# Altium PCB PCB ASCII (3u v0.1-A1).PcbDoc (part 2 of 2)
Units mil, origin at the board's own origin, x right, y up, seen from the top; angles counter-clockwise.
Board outline 2630 x 740 mil, 4 copper layers (Top Layer, Mid-Layer 1, Mid-Layer 2, Bottom Layer), stack 61.6 mil thick; 74 components, 43 nets, 261 pads, 288 vias.
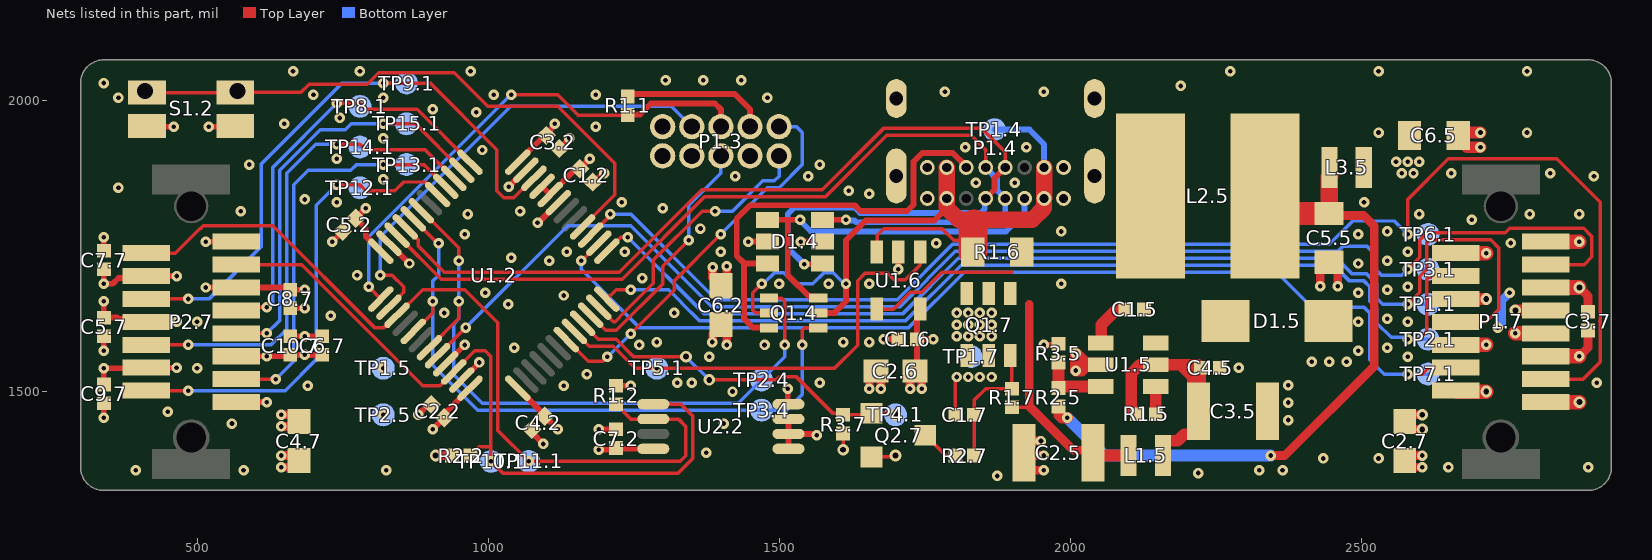
[diagram p2: the nets of this part, all layers, seen from the top]

## Part data
C1.2 C1.5 C1.6 C1.7 C2.2 C2.5 C3.2 C3.5 C3.7 C4.2 C4.5 C5.2 C5.5 C5.7 C6.5 C6.7 C7.2 C7.7 C8.7 C9.7 C10.7: library part "CAPACITOR NON_POL"
C2.6: library part C0402, "derates to 2.2"
C2.7 C4.7 C6.2: library part C0402
D1.5: "Schottky Diode"
L1.5 L2.5 L3.5: library part Inductor, "Inductor"
P1.3: "Header, 10-Pin"
P1.4: "USB C Connector"
P1.7 P2.7: "Header, 15-Pin"
Q2.7: "N-Channel Enhancement Mode Vertical DMOS FET"
R1.1 R1.2 R1.6 R1.7 R2.2 R2.7 R3.7: library part RESISTOR
R1.5: library part ERJ2GE
R2.5 R3.5: library part ERJ2GE, "Resistor"
S1.2: "Momentary switch"
TP1.1 TP1.4 TP1.5 TP1.7 TP2.1 TP2.4 TP2.5 TP3.1 TP3.4 TP4.1 TP5.1 TP6.1 TP7.1 TP8.1 TP9.1 TP10.1 TP11.1 TP12.1 TP13.1 TP14.1 TP15.1: library part Socket, "Socket"
U1.5: library part ADP2300, "IC BUCK ADJ 1.2A 6TSOT"
U1.6: library part INA180, "Current Sense Amp"

## Via types
v1: diameter 18, hole 8, Top Layer to Bottom Layer, tented both sides, 275 vias
v2: diameter 20, hole 10, Top Layer to Bottom Layer, tented both sides, 13 vias

## Nets (pads, with @x,y where several pads share a name; then routed paths per layer and width w, separated by ;. In a path a pad name is that pad's centre, name@x,y a point inside that pad or via, vN(x,y) a via of type N, cw(c..) or ccw(c..) an arc to the next point about the centre after c; other vN are vias at no path point)
3V3: C1.2.1 C1.6.1 C2.2.1 C2.6.2 C3.2.1 C4.2.1 C4.7.2 C5.2.1 C5.7.1 C6.2.2 C6.5.2 C6.7.1 C7.2.1 C7.7.2 C8.7.2 C9.7.2 C10.7.2 L3.5.2 P1.3.1 P2.7.4 P2.7.5 P2.7.11 P2.7.12 R1.2.2 R2.2.2 TP1.5.1 U1.2.1 U1.2.20 U1.2.21 U1.2.24 U1.2.36 U1.2.48 U1.6.5 U2.2.1 U2.2.2 U2.2.3 U2.2.8 | length 1823.1
  Top Layer w10: v1(339.79,1570) 339.89,1570.11 339.89,1594.89 C5.7.1@340,1595 ; v1(339.79,1685) 339.86,1685.07 355.07,1685.07 365,1695 409.41,1695 P2.7.4@412.83,1698.43 v1(465,1698.43) ; v1@339.89,1685.11 339.89,1709.89 C7.7.2@340,1710 ; C9.7.2@340,1511.97 339.79,1512.18 v1(339.79,1540) 411.89,1540 P2.7.12@412.83,1540.94 v1(464.79,1540.94) ; v1(514.79,1678.74) P2.7.5@567.17,1678.74 656.26,1678.74 C8.7.2@660,1675 v1(685,1675) ; P2.7.11@567.17,1560.63 v1(619.79,1560.63) 657.6,1560.63 C10.7.2@660,1563.03 v1(685,1563.03) C6.7.1@715,1563.03 ; C5.2.1@772.61,1797.61 v1(790,1815) ; C5.2.1@775,1795 790,1780 790,1766.89 U1.2.36@815.82,1741.06 ; v1(905,1435) C2.2.1@925,1455 925,1461.89 U1.2.48@968.94,1505.82 ; U1.2.1@1051.06,1505.82 1097.61,1459.28 C4.2.1@1097.61,1457.61 1120,1435.21 v1(1120,1435) ; U1.2.24@1051.06,1894.18 1096.89,1940 C3.2.1@1100,1940 1100,1942.61 1114.79,1957.39 v1(1114.79,1960) ; U1.2.21@1092.82,1852.42 U1.2.20@1106.74,1838.5 1150.85,1882.61 C1.2.1@1157.39,1882.61 v1(1174.79,1900) ; v1(1190,1400) 1216.97,1400 C7.2.1@1220,1403.03 1221.42,1401.61 U2.2.8@1283.86,1401.61 ; R1.2.2@1220,1510 v1(1245,1510) ; U2.2.1@1516.14,1401.61 U2.2.3@1516.14,1452.8 ; U2.2.2@1516.14,1427.2 1560.09,1427.2 1562.29,1425 v1(1565,1425) ; C2.6.2@1733.46,1535 1736.97,1538.5 C1.6.1@1736.97,1590 ; U1.6.5@1742.4,1641.57 1736.97,1636.14 C1.6.1@1736.97,1590 ; v1(1765,1590) C1.6.1@1736.97,1590
  Top Layer w15: v1(645,1370) 663.46,1370 C4.7.2@675,1381.54 666.54,1390 v1(645,1390) ; v2(910,1390) R2.2.2@938.03,1390 ; v1(1385,1585) 1385.96,1585 1385.96,1598.99 1400,1613.03 C6.2.2@1400,1615 1410,1605 v1(1410,1580) ; v1(1725,1505) 1725,1526.54 C2.6.2@1733.46,1535 1745,1523.46 v1(1745,1505)
  Bottom Layer w15: v1(2735,1610) 2735,1610.81 2741.5,1617.31 2741.5,1656.5 v1(2755,1670)
  other v1: 1875,1355 2220,1360 395,1365 580,1365 825,1365 2650,1370 2890,1370 2435,1385 2530,1385 1375,1395 560,1445 1405,1445 450,1465 1420,1500 690,1510 1130,1510 1325,1515 1570,1515 2905,1515 820,1540 1045,1575 1290,1585 1610,1585 1655,1585 730,1630 1320,1635 1035,1650 1130,1665 995,1670 1655,1685 1985,1685 1105,1725 1040,1730 1400,1740 1770,1755 2756.98,1755.18 1985,1775 2690,1795 965,1805 2600,1805 2790,1805 2875,1805 575,1810 1055,1810 1300,1815 685,1830 1655,1840 365,1850 1425,1870 2900,1870 2570,1875 2590,1875 2655,1875 2825,1875 590,1890 1570,1890 2560,1895 2580,1895 2600,1895 990,1915 1185,1955 650,1960 980,1980 905,1985 365,2005 1480,2005 700,2010 1185,2010 1785,2015 1955,2015 2190,2025 780,2050 970,2050
ENTER_BL: S1.2.1 S1.2.1_1 S1.2.1_2 S1.2.1_3 U1.2.16 | length 1014.7
  Top Layer w6: S1.2.1@414.21,2013.54 S1.2.1_1@565.79,2013.54 566.39,2014.15 678.69,2014.15 692.54,2028 792.54,2028 812.54,2048 942,2048 999.83,1990.17 1119.83,1990.17 1217.79,1892.21 1217.79,1838.25 1162.42,1782.87 U1.2.16@1162.42,1782.82
GND: C1.2.2 C1.6.2 C2.2.2 C2.5.1 C2.6.1 C2.7.1 C3.2.2 C3.5.1 C3.7.2 C4.2.2 C4.5.1 C4.7.1 C5.2.2 C5.5.1 C5.7.2 C6.2.1 C6.5.1 C6.7.2 C7.2.2 C7.7.1 C8.7.1 C9.7.1 C10.7.1 D1.4.2 D1.4.5 D1.5.A P1.3.3 P1.4.1 P1.4.1_1 P1.4.1_2 P1.4.1_3 P1.4.A1 P1.4.A12 P1.4.B1 P1.4.B12 P1.7.1 P1.7.2 P1.7.9 P1.7.10 P1.7.11 P2.7.1 P2.7.8 P2.7.15 Q2.7.2 R3.5.1 R3.7.1 S1.2.2 S1.2.2_1 TP2.5.1 U1.2.19 U1.2.23 U1.2.35 U1.2.45 U1.2.47 U1.5.2 U1.6.2 U2.2.4 | length 2194.3
  Top Layer w6: v2(1610,1400) R3.7.1@1610,1428.03 ; Q2.7.2@1658.74,1387.6 1697.6,1387.6 v2(1700,1390)
  Top Layer w10: v1(339.79,1455) 339.89,1455.11 339.89,1479.89 C9.7.1@340,1480 ; v1(339.79,1655) 339.79,1627.18 C5.7.2@340,1626.97 363.03,1626.97 365,1625 407.52,1625 P2.7.8@412.83,1619.68 v1(465,1619.68) ; v1(339.79,1765) 339.89,1764.89 339.89,1742.07 C7.7.1@340,1741.97 ; S1.2.2@413.27,1955.52 S1.2.2@414.21,1956.46 415.67,1955 v1(460,1955) ; v1(515,1757.48) P2.7.1@567.17,1757.48 ; v1(520,1955) 567.24,1955 S1.2.2_1@565.79,1956.46 ; P2.7.15@567.17,1481.89 v1(619.79,1481.89) ; C10.7.1@660,1595 v1(685,1595) C6.7.2@715,1595 ; C8.7.1@660,1643.03 v1(685,1643.03) ; v1(732.61,1757.61) C5.2.2@750,1775 ; U1.2.35@829.74,1754.98 864.73,1720 v1(865,1720) ; v1(880,1460) 897.61,1477.61 C2.2.2@902.39,1477.61 ; U1.2.45@927.18,1547.58 959.6,1580 v1(960,1580) ; U1.2.47@955.02,1519.74 985.27,1550 v1(985,1550) ; v1@1036.64,1851.91 v1(1035.4,1851.91) U1.2.23@1052.38,1868.88 ; U1.2.23@1052.4,1868.86 1053.58,1868.86 U1.2.23@1064.98,1880.26 ; C4.2.2@1075,1435 1075,1430 v1(1095,1410) ; v1(1085,1790) 1086.08,1790 U1.2.19@1120.66,1824.58 ; C3.2.2@1122.61,1917.39 1122.61,1917.61 1139.79,1934.79 v1(1139.79,1935) ; C1.2.2@1180,1860 1182.39,1860 1197.39,1875 v1(1199.79,1875) ; v1(1190,1435) C7.2.2@1220,1435 ; v1(1447.24,1757.6) D1.4.2@1480,1757.6 ; v1(1515,1505) 1515,1479.53 U2.2.4@1516.14,1478.39 ; v1(1537.24,1757.6) D1.4.5@1574.49,1757.6 ; v1(1680,1590) C1.6.2@1705,1590 ; v1(1705,1710) U1.6.2@1705,1740 ; v1(1955,1580) 1978.03,1580 R3.5.1@1980,1581.97
  Top Layer w15: v1(645,1440) 666.54,1440 C4.7.1@675,1448.46 663.46,1460 v1(645,1460) ; v1(1385.83,1713.4) 1385.83,1696.1 C6.2.1@1400,1681.93 1410,1691.93 v1(1410,1715) ; v1(1655,1505) 1655,1523.46 C2.6.1@1666.54,1535 1675,1526.54 v1(1675,1505) ; v1(1950,1415) 1930.94,1415 1920.94,1405 C2.5.1@1920.94,1402.19 ; v1(1955,1365) 1933.13,1365 1920.94,1377.19 C2.5.1@1920.94,1402.19 ; v1(1955,1390) 1933.13,1390 C2.5.1@1920.94,1402.19 ; v1(2430,1681.06) 2430,1709.56 2442.5,1722.06 C5.5.1@2445,1722.06 2447.5,1722.06 2460,1709.56 v1(2460,1681.06) ; v1(2605,1370) 2586.54,1370 C2.7.1@2575,1381.54 2583.46,1390 v1(2605,1390) ; v1(2875,1560.63) 2890,1575.63 C3.7.2@2890,1605
  Top Layer w20: v1(2705,1920) 2682,1920 2667,1935 C6.5.1@2667,1940 2677,1950 2682,1945 v1(2705,1945) ; v1(2010,1536.06) v1(2010,1566.06) 2027.21,1548.86 2049.96,1548.86 U1.5.2@2052.76,1546.06 2049.96,1543.27 2027.2,1543.27 2020,1536.06 v1(2010,1536.06)
  Top Layer w25: P1.7.10@2662.83,1580.31 v1(2715,1580.31) ; P1.7.2@2662.83,1737.8 v1(2715,1737.8) ; v1(2765,1600) P1.7.9@2817.17,1600 ; P1.7.11@2817.17,1560.63 v1(2875,1560.63) ; P1.7.1@2817.17,1757.48 v1(2875,1757.48)
  other v1: 2325,1365 2365,1365 2375,1451.06 820,1460 2375,1481.06 2375,1511.06 1350,1515 1170,1530 500,1540 2290,1541.06 2415,1551.06 2445,1551.06 2475,1551.06 1380,1560 2580,1560 2495,1570 2545,1575 1260,1580 1475,1580 500,1620 2495,1620 2580,1620 2545,1625 925,1635 2495,1670 2545,1675 2580,1680 1500,1685 1585,1685 1265,1695 775,1700 2495,1720 2545,1725 1135,1740 1235,1740 2580,1740 960,1770 2495,1770 2545,1775 1365,1780 740,1825 1230,1825 2505,1825 1620,1845 1838.27,1858.42 1905.2,1858.42 820,1865 1550,1870 740,1900 1820,1920 1925,1920 820,1935 2530,1945 2785,1945 745,1970 820,2005 1010,2010 340,2030 1305,2035 1370,2035 1435,2035 665,2050 2275,2050 2530,2050 2785,2050
I2C1_SCL: P2.7.2 R1.2.1 TP11.1.1 U1.2.39 U2.2.6 | length 1466.6
  Top Layer w6: P2.7.2@412.83,1737.8 462.82,1737.8 505,1779.98 505.96,1779.98 510.98,1785 630,1785 805,1610 821.24,1610 842.33,1631.1 U1.2.39@843.66,1631.1 887.56,1675 960,1675 1017,1618 1017,1433 v1(1070,1380) 1330,1380 1340,1390 1340,1440 1327.2,1452.8 U2.2.6@1283.86,1452.8 1245.24,1452.8 R1.2.1@1220,1478.03
I2C1_SDA: P2.7.3 R2.2.1 TP10.1.1 U1.2.46 U2.2.5 | length 1291.1
  Top Layer w6: P2.7.3@567.17,1718.11 679.92,1718.11 888.03,1510 917.44,1510 U1.2.46@941.1,1533.66 977.44,1570 995,1570 1005,1560 1005,1405 ; R2.2.1@970,1390 985,1405 1005,1405 ; U2.2.5@1285,1479.53 U2.2.5@1283.86,1478.39 1331.61,1478.39 1352,1458 1352,1385.03 1326.97,1360 1025,1360 v1(1005,1380) 1005,1405
NetC1.5_1: C1.5.1 U1.5.1 | length 83.9
  Top Layer w20: U1.5.1@2052.76,1583.46 2053.48,1584.19 2053.48,1614.54 2080,1641.06 C1.5.1@2095,1641.06
NetC1.5_2: C1.5.2 D1.5.K L2.5.1 U1.5.6
NetC1.7_2: C1.7.2 Q1.7.3 R1.7.1 R2.7.2 | length 226.2
  Top Layer w6: R2.7.2@1835,1390 C1.7.2@1835,1460 1835,1485 1855,1505 R1.7.1@1900,1505 1900,1559.25 Q1.7.3@1897.4,1561.85
NetC3.5_2: C3.5.2 C4.5.2 L1.5.2 R1.5.2 U1.5.5 | length 490.6
  Top Layer w20: R1.5.2@2115,1461.06 2105,1471.06 2105,1531.06 2120,1546.06 U1.5.5@2147.24,1546.06 2190,1546.06 ; L1.5.2@2159.53,1390 2159.53,1411.65 2163.31,1415.43 2184.96,1415.43 2196.38,1426.85 2211.26,1426.85 C3.5.2@2220.94,1436.54 ; C3.5.2@2220.94,1466.06 C3.5.2@2213.76,1473.25 ; 2190,1546.06 2211.26,1524.8 2211.26,1475.75 C3.5.2@2213.76,1473.25 ; 2190,1546.06 2220,1546.06 C4.5.2@2225,1541.06 2223.19,1539.25 2223.19,1482.68 C3.5.2@2213.76,1473.25
  Top Layer w30: C3.5.2@2220.94,1436.54 C3.5.2@2220.94,1466.06
NetC5.5_2: C5.5.2 L2.5.2 L3.5.1 R2.5.2 | length 1163.2
  Top Layer w15: v1(2345,1390) 2368.94,1390 2522.5,1543.56 2522.5,1784.32 2504.32,1802.5 2448.56,1802.5 C5.5.2@2445,1806.06
  Top Layer w20: R2.5.2@1980,1474.09 1981.81,1472.28 1981.81,1459.25 1986.06,1455 v1(1995,1455)
  Top Layer w30: C5.5.2@2445,1806.06 2445,1869.25 L3.5.1@2446.22,1870.47
  Top Layer w40: L2.5.2@2335,1836.06 2365,1806.06 C5.5.2@2445,1806.06
  Bottom Layer w20: v1(1995,1455) 2060,1390 v1(2345,1390)
NetD1.4_1: D1.4.1 P1.4.A5 Q1.4.3 | length 667.1
  Top Layer w10: D1.4.1@1478.8,1793.8 D1.4.1@1480,1795 1515,1795 ; v1(1536,1795) 1515,1795 ; Q1.4.3@1556.54,1663.46 1564.45,1663.46 Q1.4.3@1567.32,1660.59 ; Q1.4.3@1567.91,1660 Q1.4.3@1567.32,1660.59 ; 1515,1795 1515,1700 1554.41,1660.59 Q1.4.3@1567.32,1660.59
  Bottom Layer w10: v1(1536,1795) 1536,1794 1555,1775 1890,1775 1921.93,1806.93 P1.4.A5@1921.93,1831.85
NetD1.4_3: D1.4.3 P1.4.B5 Q1.4.6 | length 770.8
  Top Layer w10: D1.4.3@1480,1720.2 1440,1720.2 ; Q1.4.6@1482.68,1609.41 1482.09,1610 1455,1610 1440,1625 1440,1720.2 ; P1.4.B5@1821.54,1885 1821.54,1886.89 1798.43,1910 1745.95,1910 1730.81,1894.86 1730.81,1820.81 1720,1810 1640,1810 1630,1820 1450,1820 1427.24,1797.24 1427.24,1732.95 1440,1720.2
NetD1.4_4: D1.4.4 P1.4.A7 P1.4.B7 U1.2.33 | length 1780.2
  Top Layer w6: U1.2.33@857.58,1782.82 880,1760.4 880,1750 925,1705 1225.46,1705 1367.46,1847 1574.37,1847 1679.37,1952 1848,1952 1888.46,1911.54 P1.4.B7@1888.46,1885
  Top Layer w10: v1(1543.2,1718.56) D1.4.4@1572.85,1718.56 ; P1.4.A7@1855,1832.04 1870,1847.04 1870,1866.35 1888.46,1884.81 P1.4.B7@1888.46,1885
  Top Layer w15: D1.4.4@1572.85,1718.56 D1.4.4@1574.49,1720.2
  Bottom Layer w10: v1(1543.2,1718.56) 1515,1746.76 1515,1805 1526,1816 1630,1816 1639,1807 1847,1807 1853.47,1813.47 P1.4.A7@1853.47,1830.32
  Bottom Layer w15: P1.4.A7@1853.47,1830.32 P1.4.A7@1855,1831.85
NetD1.4_6: D1.4.6 P1.4.A6 P1.4.B6 U1.2.34 | length 1601.9
  Top Layer w6: U1.2.34@843.66,1768.9 919.56,1693 1230.43,1693 1372.43,1835 1580,1835 1685,1940 1830,1940 1855,1915 P1.4.B6@1855,1885
  Top Layer w10: D1.4.6@1572.09,1792.6 D1.4.6@1574.49,1795 v1(1615,1795)
  Bottom Layer w10: v1(1615,1795) 1615.99,1794.01 1629.36,1794.01 1632.37,1791 1871,1791 1888.46,1808.46 P1.4.A6@1888.46,1831.85 ; P1.4.B6@1855,1885 1855,1884.81 1875,1864.81 1875,1845.5 P1.4.A6@1888.46,1832.04
NetP1.3_2: P1.3.2
NetP1.3_4: P1.3.4 U1.2.38 | length 802.2
  Top Layer w6: v1(815,1700) 835,1700 855,1680 855,1670.27 U1.2.38@829.74,1645.02
  Bottom Layer w6: v1(815,1700) 815,1766.25 1038.75,1990 1315,1990 P1.3.4@1350,1955
NetP1.3_5: P1.3.5 U1.2.10 | length 429.2
  Top Layer w6: U1.2.10@1176.34,1631.1 1202.44,1605 1220.3,1605 1300,1684.7 1300,1715 v1(1345,1760)
  Bottom Layer w6: v1(1345,1760) 1345,1820 1400,1875 P1.3.5@1400,1905
NetP1.3_6: P1.3.6 R1.1.2 U1.2.37 | length 878.8
  Top Layer w6: v1(795,1680) 795,1679.76 U1.2.37@815.82,1658.94 ; v1(1040,2010) 1120,2010 1155,1975 R1.1.2@1240,1975
  Top Layer w10: R1.1.2@1240,1975 1240.95,1975.95 1260.95,1975.95 1280,1995 1390,1995 1400,1985 P1.3.6@1400,1955
  Bottom Layer w6: v1(795,1680) 795,1766.25 1038.75,2010 v1(1040,2010)
NetP1.3_7: P1.3.7
NetP1.3_8: P1.3.8 R1.1.1 | length 252.4
  Top Layer w10: R1.1.1@1240,2006.97 1244.03,2011 1424,2011 1450,1985 P1.3.8@1450,1955
NetP1.3_9: P1.3.9 U1.2.11 | length 482.2
  Top Layer w6: U1.2.11@1190.26,1645.02 1215.27,1620 1218.33,1620 1235.09,1636.76 1284.07,1685.73 1284.07,1725.93 1368.13,1810 v1(1390,1810)
  Bottom Layer w6: v1(1390,1810) 1420,1810 1472,1862 1492,1862 1500,1870 P1.3.9@1500,1905
NetP1.3_10: P1.3.10 U1.2.7 | length 669.4
  Top Layer w6: U1.2.7@1134.58,1589.34 1171.96,1551.96 1196.96,1551.96 v1(1205,1560) ; v1(1245,1599.01) 1320,1674.01 1320,1690 v1(1400,1770)
  Bottom Layer w6: v1(1205,1560) 1205.99,1560 v1(1245,1599.01) ; v1(1400,1770) 1480,1850 1500,1850 1540,1890 1540,1945 1530,1955 P1.3.10@1500,1955
NetP1.4_A4: P1.4.A4 P1.4.A9 P1.4.B4 P1.4.B9 Q1.4.2 Q1.4.5 R1.6.2 TP1.4.1 U1.6.3 | length 1337.6
  Top Layer w6: v1(1470,1685) 1455,1670 1455,1640 1460,1635 Q1.4.5@1482.68,1635 ; U1.6.3@1667.6,1740 1668.83,1741.23 1668.83,1768.83 1680,1780 1780,1780 1800,1760 1813,1760 R1.6.2@1833,1740
  Top Layer w10: Q1.4.2@1567.32,1635 1595,1635 1615,1655 v1(1615,1685) 1615,1760 1649,1794 1766.8,1794 1788.18,1815.38
  Top Layer w28: P1.4.B4@1788.07,1885 P1.4.A9@1788.07,1831.85 1788.18,1831.74 1788.18,1815.38 1808.57,1795 1935,1795 1955.28,1815.28 1955.28,1831.74 P1.4.A4@1955.39,1831.85 P1.4.B9@1955.39,1885
  Top Layer w50: R1.6.2@1833,1740 1833,1786.06 1835,1788.06
  Bottom Layer w6: v1(1470,1685) 1473.13,1685 1492.13,1704 1507.87,1704 1526.87,1685 1558.13,1685 1577.13,1704 1592.87,1704 1611.87,1685 v1(1615,1685)
  Bottom Layer w10: TP1.4.1@1870,1950 1930,1950 1955.39,1924.61 P1.4.B9@1955.39,1885 P1.4.B9@1955,1885.39
NetP1.7_3: P1.7.3 TP3.1.1 U1.2.44 | length 2422.8
  Top Layer w6: U1.2.44@913.26,1561.5 961.76,1610 v1(961.87,1610) ; v1(2580,1710) 2600.89,1730.89 2600.89,1760.27 2613.19,1772.57 2727.6,1772.57 2747.57,1772.57 2755.26,1780.26 2882.63,1780.26 2896.5,1766.39 2896.5,1731.5 2883.11,1718.11 P1.7.3@2817.17,1718.11
  Bottom Layer w6: v1(961.87,1610) 1136.87,1785 1245.46,1785 1384.46,1646 1707.97,1646 1802.97,1741 2460,1741 2469,1750 2510,1750 2525,1735 2525,1710 2535,1700 2570,1700 v1(2580,1710) TP3.1.1@2615,1710
NetP1.7_4: P1.7.4 TP2.1.1 U1.2.12 | length 1741.7
  Top Layer w6: U1.2.12@1204.18,1658.94 1220.24,1675 v1(1245,1675) ; v1(2580,1590) 2600,1590 2612.89,1602.89 2612.89,1692.89 2616.4,1696.4 2660.81,1696.4 P1.7.4@2662.83,1698.43
  Bottom Layer w6: v1(1245,1675) 1310.46,1675 1333,1652.46 1333,1652 1363,1622 1717.91,1622 1812.91,1717 2453,1717 2480,1690 2505,1690 2515,1680 2515,1655 2527,1643 2527,1617.54 2551.54,1593 2577,1593 v1(2580,1590) TP2.1.1@2615,1590
NetP1.7_8: P1.7.8 TP1.1.1 U1.2.13 | length 2001
  Top Layer w6: U1.2.13@1205.05,1741.06 U1.2.13@1204.18,1741.06 1228.11,1765 v1(1240,1765) ; v1(2580,1650) 2600.89,1670.89 2600.89,1697.86 2612.89,1709.86 2612.89,1755.3 2618.16,1760.57 2722.63,1760.57 2736.5,1746.7 2736.5,1641.5 2714.68,1619.68 P1.7.8@2662.83,1619.68
  Bottom Layer w6: v1(1240,1765) 1371,1634 1712.94,1634 1807.94,1729 2457.97,1729 2484.97,1702 2509.97,1702 2527,1684.97 2527,1660 2530.99,1656.01 2536.97,1650 v1(2580,1650) TP1.1.1@2615,1650
NetP1.7_12: P1.7.12 TP7.1.1 U1.2.14 | length 1800.5
  Top Layer w6: v1(1160,1725) 1160.83,1725 1190.26,1754.43 U1.2.14@1190.26,1754.98 ; v1(2580,1530) 2605,1530 2615.95,1540.94 P1.7.12@2662.83,1540.94
  Bottom Layer w6: v1(1160,1725) 1160,1710 1260,1610 1722.88,1610 1817.88,1705 2355,1705 2415,1645 2505,1645 2515,1635 2515,1555 2540,1530 v1(2580,1530) TP7.1.1@2615,1530
NetP1.7_13: P1.7.13 TP6.1.1 U1.2.15 | length 2416.1
  Top Layer w6: U1.2.15@1176.34,1768.9 1212.44,1805 v1(1210,1805) ; v1(2580,1770) 2580,1830 2650,1900 2835.81,1900 2910.81,1825 2910.81,1621.43 2910.37,1620.98 2910.81,1620.54 2910.81,1550.81 2881.26,1521.26 P1.7.13@2817.17,1521.26
  Bottom Layer w6: v1(1210,1805) 1245,1805 1392,1658 1703,1658 1798,1753 2445.57,1753 2485.57,1793 2557,1793 v1(2580,1770) TP6.1.1@2615,1770
NetP2.7_6: P2.7.6 TP9.1.1 U1.2.22 | length 1079.9
  Top Layer w6: P2.7.6@413.04,1659.26 P2.7.6@412.83,1659.06 v1(485,1659.06) ; v1(820,2030) 900.46,2030 1015,1915.46 1015,1845 1027.09,1832.91 1044.39,1832.91 1077.81,1866.34 U1.2.22@1078.9,1866.34
  Bottom Layer w6: v1(485,1659.06) 520.56,1659.06 610,1748.49 610,1890.46 749.54,2030 v1(820,2030) TP9.1.1@860,2030
NetP2.7_7: P2.7.7 TP8.1.1 U1.2.25 | length 777.8
  Top Layer w6: P2.7.7@567.17,1639.37 572.74,1644.94 v1(620,1644.94) ; v1(740,1995) 780,1995 790,1985 878.11,1985 U1.2.25@968.94,1894.18
  Bottom Layer w6: v1(620,1644.94) 620,1639.88 630,1649.88 630,1885 v1(740,1995) 775,1995 TP8.1.1@780,1990
NetP2.7_9: P2.7.9 TP15.1.1 U1.2.26 | length 761.2
  Top Layer w6: P2.7.9@567.17,1600 v1(620,1600) ; v1(820,1960) 875.27,1960 U1.2.26@955.02,1880.26
  Bottom Layer w6: v1(620,1600) 642,1622 642,1880.03 711.97,1950 755,1950 765,1960 v1(820,1960) TP15.1.1@860,1960
NetP2.7_10: P2.7.10 TP14.1.1 U1.2.27 | length 894.4
  Top Layer w6: P2.7.10@412.83,1580.31 v1(485,1580.31) ; v1(740,1925) 780,1925 790,1915 892.44,1915 U1.2.27@941.1,1866.34
  Bottom Layer w6: v1(485,1580.31) 627.18,1580.31 654,1607.13 654,1875.06 703.94,1925 v1(740,1925) 775,1925 TP14.1.1@780,1920
NetP2.7_13: P2.7.13 TP13.1.1 U1.2.28 | length 745.7
  Top Layer w6: P2.7.13@567.17,1521.26 v1(635,1521.26) ; v1(820,1890) 889.6,1890 U1.2.28@927.18,1852.42
  Bottom Layer w6: v1(635,1521.26) 666,1552.26 666,1855 691,1880 764.43,1880 774.43,1890 v1(820,1890) TP13.1.1@860,1890
NetP2.7_14: P2.7.14 TP12.1.1 U1.2.29 | length 863.4
  Top Layer w6: P2.7.14@412.83,1501.57 v1(485,1501.57) ; v1(740,1855) 780,1855 790,1845 840,1845 855,1860 891.76,1860 U1.2.29@913.26,1838.5
  Bottom Layer w6: v1(485,1501.57) 651.57,1501.57 705,1555 705,1820 v1(740,1855) 775,1855 TP12.1.1@780,1850
NetQ2.7_1: Q2.7.1 R2.7.1 | length 66.8
  Top Layer w6: Q2.7.1@1751.26,1425 1752.25,1425 1766.96,1410.28 1766.96,1409.3 1785.74,1390.53 1802.51,1390.53 R2.7.1@1803.03,1390
NetQ2.7_3: Q2.7.3 R3.7.2 TP4.1.1 U1.2.9 | length 608.8
  Top Layer w6: U1.2.9@1162.42,1617.18 1189.6,1590 1220,1590 1250,1560 v2(1340,1560) ; v2(1380,1520) 1495,1520 1500,1525 1530,1525 1592.7,1462.3 1607.7,1462.3 R3.7.2@1610,1460 1656.34,1460 Q2.7.3@1658.74,1462.4 1697.6,1462.4 v2(1700,1460)
  Bottom Layer w6: v2(1340,1560) v2(1380,1520)
NetR1.5_1: R1.5.1 U1.5.4 | length 47.7
  Top Layer w20: R1.5.1@2146.97,1461.06 2146.97,1508.39 U1.5.4@2147.24,1508.66
NetR2.5_1: R2.5.1 R3.5.2 U1.5.3 | length 117.8
  Top Layer w20: R3.5.2@1980,1550 R2.5.1@1980,1506.06 1982.6,1508.66 U1.5.3@2052.76,1508.66
NetTP5.1_1: TP5.1.1 U1.2.8 U1.6.1 | length 790.5
  Top Layer w6: U1.2.8@1148.5,1603.26 1148.61,1603.26 1173.87,1578 1215.03,1578 1253.03,1540 v1(1290,1540) 1595.29,1540 ; 1595.29,1540.29 1595.29,1540 ; U1.6.1@1742.4,1740 1742.4,1717.4 1717,1692 1697.54,1692 1686.54,1703 1647.54,1703 1635,1690.46 1635,1579.71 1595.29,1540
UCPD1_CC1: Q1.4.4 TP2.4.1 U1.2.31 U1.2.43 | length 1161.1
  Top Layer w6: U1.2.31@885.42,1810.66 886.21,1810.66 950,1746.87 v1(950,1725) ; U1.2.43@899.34,1575.42 950,1626.08 v1(950,1655) ; Q1.4.4@1482.68,1660.59 1504.41,1660.59 1510,1655 v1(1510,1580)
  Bottom Layer w6: v1(950,1725) v1(950,1655) 950,1625 941,1616 941,1531 940,1530 990,1480 1430,1480 TP2.4.1@1470,1520 1510,1560 v1(1510,1580)
UCPD1_CC2: Q1.4.1 TP3.4.1 U1.2.32 U1.2.41 | length 1158.8
  Top Layer w6: U1.2.41@871.5,1603.26 873.26,1603.26 905,1635 v1(905,1655) ; U1.2.32@871.5,1796.74 913.24,1755 v1(915,1755) ; v1(1540,1580) 1540,1605 1544.41,1609.41 Q1.4.1@1567.32,1609.41
  Bottom Layer w6: v1(915,1755) 915,1700 905,1690 v1(905,1655) 905,1545 982,1468 TP3.4.1@1470,1468 1513,1468 1540,1495 v1(1540,1580)
VBUS: C2.5.2 L1.5.1 Q1.7.4 R1.6.1 R1.7.2 U1.6.4 | length 760
  Top Layer w6: U1.6.4@1667.6,1641.57 1696.57,1641.57 1725.26,1670.26 1745.26,1670.26 1780,1705 1900,1705 ; R1.7.2@1900,1473.03 1928.03,1473.03 1930,1475
  Top Layer w15: 1930,1650 1930,1475 2005.66,1399.34 2034.71,1399.34 C2.5.2@2037.96,1396.09 ; C2.5.2@2031.87,1365 2044.06,1377.19 2044.06,1390 C2.5.2@2044.06,1402.19 ; C2.5.2@2031.87,1390 C2.5.2@2037.96,1396.09 ; C2.5.2@2031.87,1402.19 C2.5.2@2044.06,1402.19 ; C2.5.2@2034.06,1415 C2.5.2@2044.06,1405 ; C2.5.2@2039.06,1395 C2.5.2@2037.96,1396.09 ; C2.5.2@2037.96,1396.09 C2.5.2@2044.06,1402.19
  Top Layer w20: C2.5.2@2031.87,1402.19 C2.5.2@2034.71,1399.34 ; C2.5.2@2039.06,1395 2044.06,1390 L1.5.1@2100.47,1390
VBUS_SW: C1.7.1 C2.7.2 C3.7.1 P1.7.5 P1.7.6 P1.7.7 P1.7.14 P1.7.15 Q1.7.1 Q1.7.2 Q1.7.5 Q1.7.6 TP1.7.1 | length 457
  Top Layer w6: C1.7.1@1803.03,1460 1803.03,1523.03 v1(1805,1525)
  Top Layer w15: v2(2605,1435) 2588.46,1435 C2.7.2@2575,1448.46 2586.54,1460 v2(2605,1460) ; v2(2875,1678.74) 2890,1663.74 C3.7.1@2890,1636.97
  Top Layer w20: P1.7.6@2662.83,1659.06 v2(2715,1659.06) ; v2(2765,1639.37) P1.7.7@2817.17,1639.37
  Top Layer w25: P1.7.14@2662.83,1501.57 2664.41,1500 v2(2715,1500) ; P1.7.15@2817.17,1481.89 v2(2875,1481.89) ; P1.7.5@2817.17,1678.74 v2(2875,1678.74)
  other v1: 1825,1525 1845,1525 1865,1525 1805,1595 1825,1595 1845,1595 1865,1595 1805,1615 1825,1615 1845,1615 1865,1615 1805,1635 1825,1635 1845,1635 1865,1635
pads on no net: P1.4.A8 P1.4.B8 P1.7.0 P1.7.0_1 P1.7.0_2 P1.7.0_3 P2.7.0 P2.7.0_1 P2.7.0_2 P2.7.0_3 U1.2.2 U1.2.3 U1.2.4 U1.2.5 U1.2.6 U1.2.17 U1.2.18 U1.2.30 U1.2.40 U1.2.42 U2.2.7

## Polygon pours and split planes (outlines as drawn)
VBUS on Top Layer "Top Layer-VBUS" (solid, pour order 6): 1895,1765 1885,1755 1885,1645 1940,1645 1940,1765
3V3 on Top Layer "Top Layer-3V3" (solid, remove dead copper, pour order 14): 300,1370 300,2030 cw(c340,2030) 340,2070 2890,2070 cw(c2890,2030) 2930,2030 2930,1370 cw(c2890,1370) 2890,1330 340,1330 cw(c340,1370)
VBUS_SW on Top Layer "Top Layer-NetC1.7_1" (solid, pour order 8): 1875,1690 1810,1690 1785,1665 1785,1530 1800,1515 1875,1515
NetC1.5_2 on Top Layer "PSU Switch" (solid, remove dead copper, pour order 4): 2075,1981.06 2075,1616.06 2120,1616.06 2120,1566.06 2325,1566.06 2325,1676.06 2235,1676.06 2235,1981.06
GND on Top Layer "PSU GND" (solid, remove dead copper, pour order 2): 2405,1746.06 2505,1746.06 2505,1561.06 2360,1416.06 2315,1416.06 2250,1481.06 2250,1556.06 2330,1556.06 2405,1631.06
3V3 on Bottom Layer "Bottom Layer-3V3" (solid, remove dead copper, pour order 20): 300,1370 300,2030 cw(c340,2030) 340,2070 2890,2070 cw(c2890,2030) 2930,2030 2930,1370 cw(c2890,1370) 2890,1330 340,1330 cw(c340,1370)
VBUS_SW on Bottom Layer "Bottom Layer-VBUS" (solid, remove dead copper, pour order 10): 2551.67,1695 2493.33,1645 1795,1645 1795,1515 1905,1515 2015,1405 2885,1405 2885,1695
GND on Bottom Layer "Bottom Layer-No Net" (solid, pour order 0): 2920,1935 2920,2060 2265,2060 2265,1935
GND on Mid-Layer 1 "Mid-Layer 1-GND" (solid, pour order 12): 300,1370 300,2030 cw(c340,2030) 340,2070 2890,2070 cw(c2890,2030) 2930,2030 2930,1370 cw(c2890,1370) 2890,1330 340,1330 cw(c340,1370)
GND on Mid-Layer 2 "GND_L03_P016" (solid, pour order 16): 300,1370 300,2030 cw(c340,2030) 340,2070 2890,2070 cw(c2890,2030) 2930,2030 2930,1370 cw(c2890,1370) 2890,1330 340,1330 cw(c340,1370)

## Silkscreen, mask and mechanical layers (free items; w line width, h text height)
Bottom Overlay:
  text "3u" at 2505,1475 h562.5
  text "v.PCB_Version" at 2495,1395 h40
Mechanical 2:
  the board outline again, w8

## Text inside footprints (layer, text, board x,y; h text height)
D1.5: Top Overlay "K" at 2201.46,1672.24 h15 r90
Designator4: Bottom Overlay "SHL2.0" at 2230.2,1942.52 h20 r270
L1.5: Mechanical 13 "OSHW" at 2795.2,1935 h140